# EAGLE board Lab 3 PCB_schematic_redo (EAGLE 9.1.3)
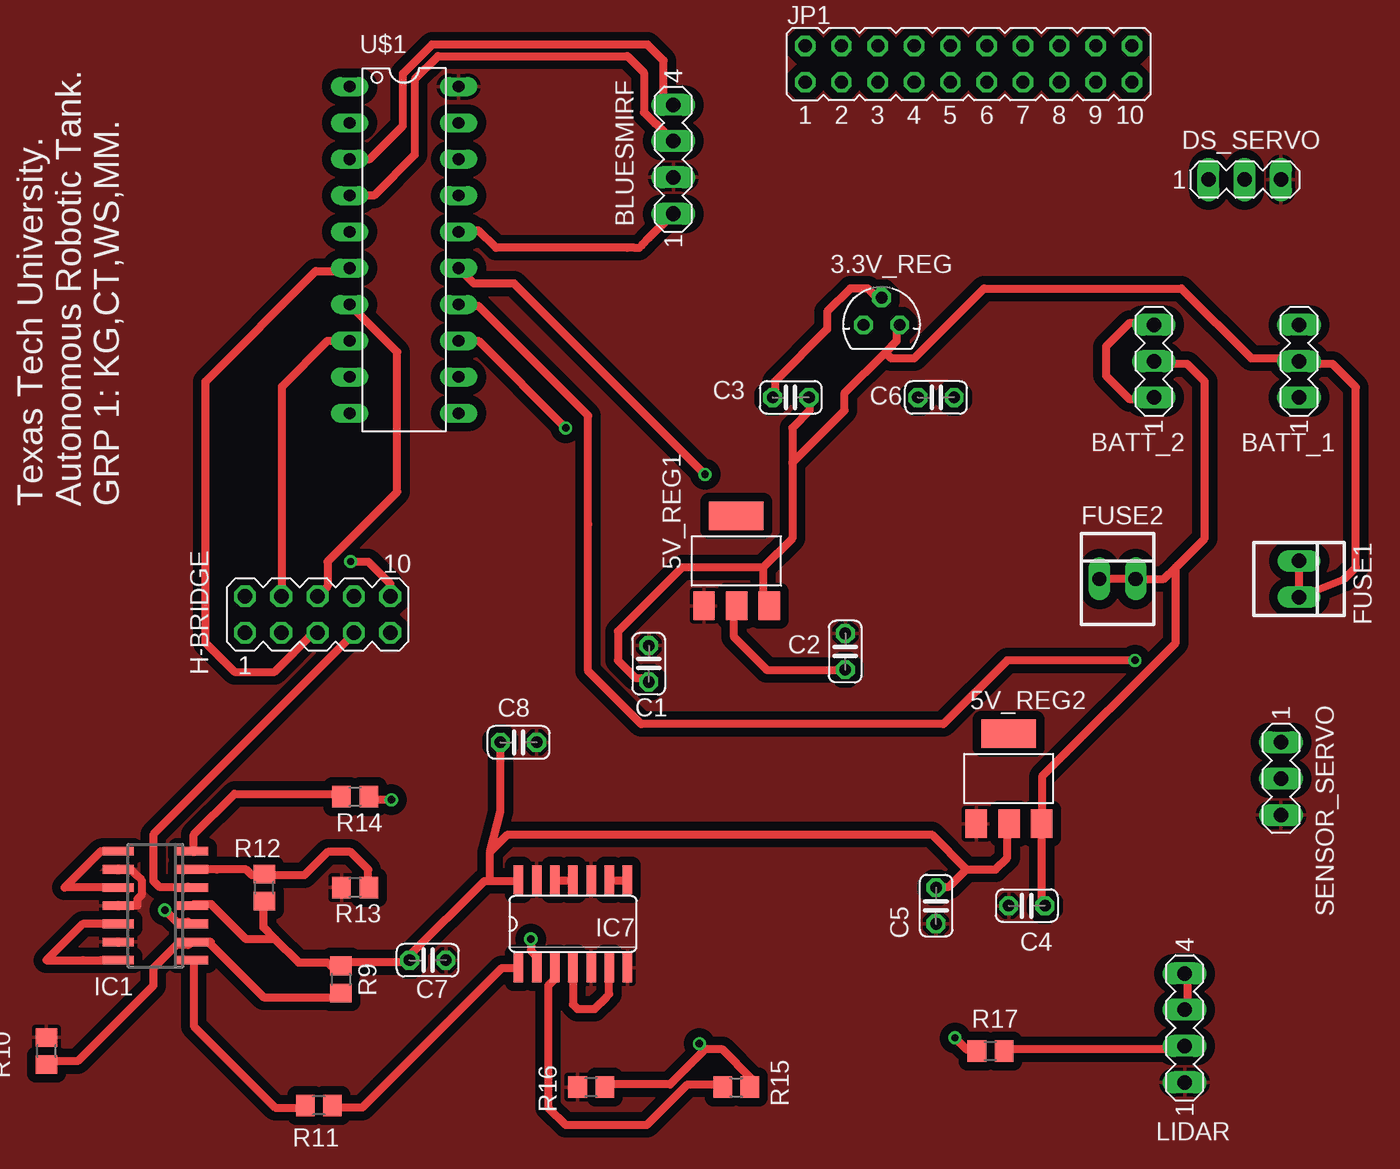
[diagram p0: board, top side]
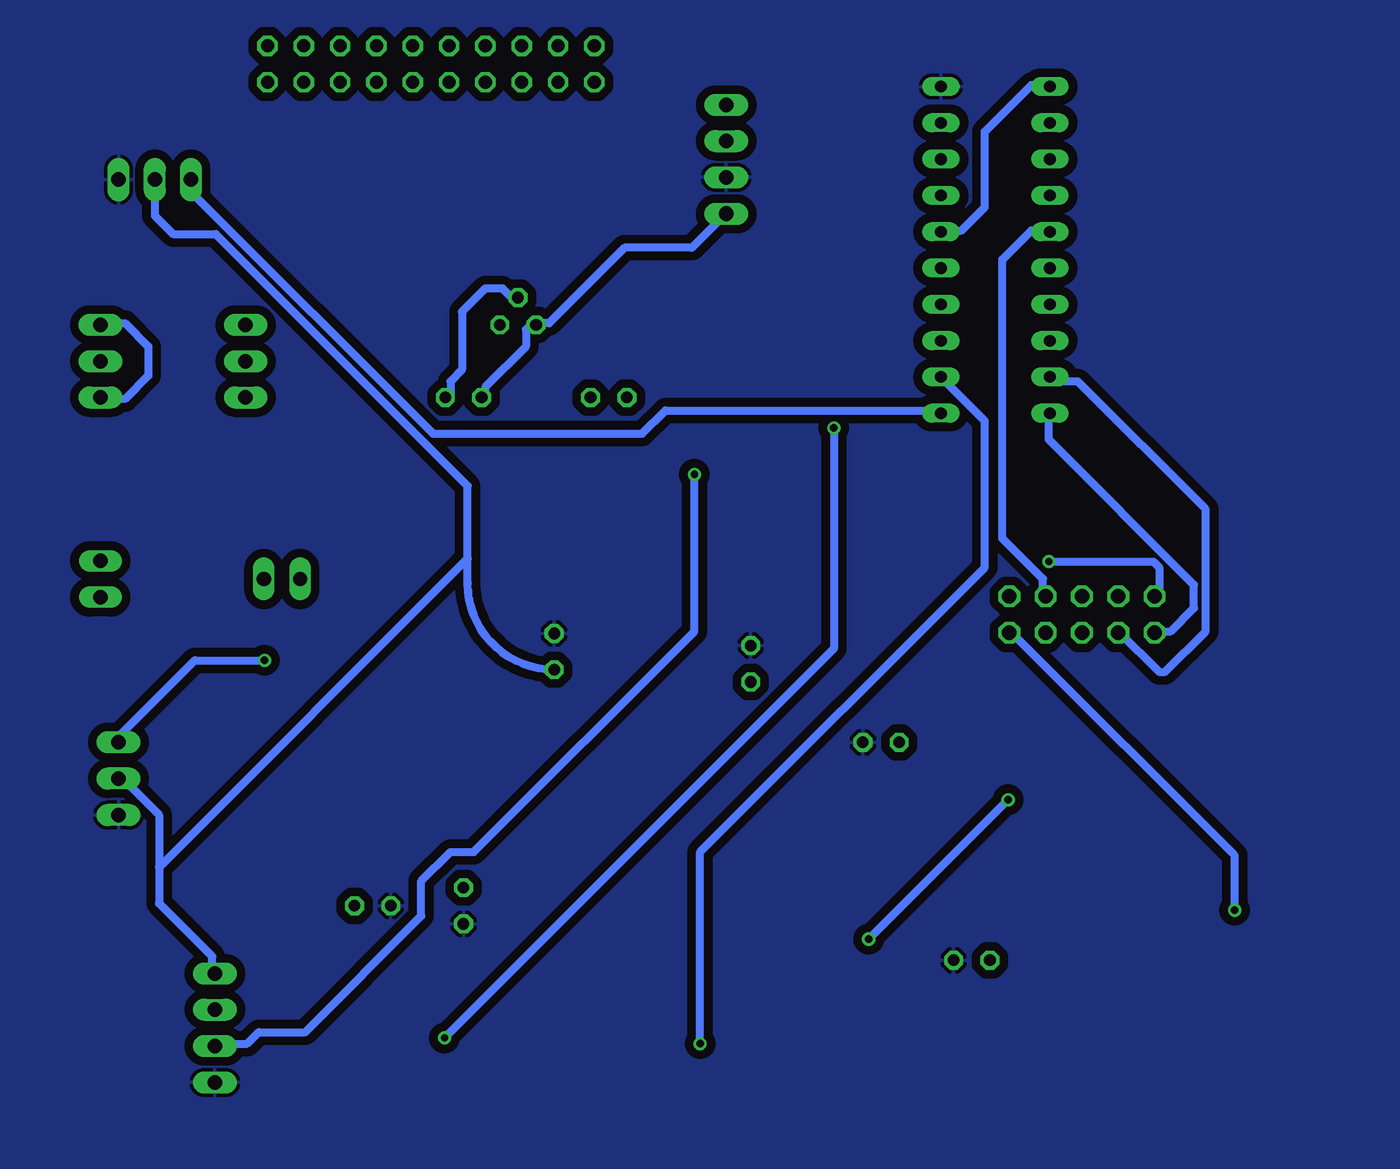
[diagram p1: board, bottom side, seen from below]

No outline drawn. Coordinates in mm, seen from the top.
Copper layers (1*16): Top 0.035mm / dielectric 1.5mm / Bottom 0.035mm
Design rules "default *": minimum track width 20mil, minimum drill 0.35mm, track to track 10mil, track to pad 10mil, pad to pad 10mil, via to via 6mil, smd to smd 6mil, copper to edge 30mil, drill to drill 14mil, minimum pad ring 10mil, minimum via ring 8mil, stop-mask expansion 4mil, vias tented up to drill 0mil, thermal gap 10mil
Net classes: 0 default: width 0.559 mm, drill 0.508 mm, clearance 0.254 mm

## Footprints (pad centres in the part's own frame; a part is rotated, then mirrored left to right if it is on the bottom)
78LXX = drill 0.813 octagon: GND 0,1.905; IN 1.27,0; OUT -1.27,0
SOT223 = smd 1.499 x 2.007: 1 -2.261,-3.15; 2 0.025,-3.15; 3 2.311,-3.15 | smd 3.81 x 2.007: 4 0,3.15
MA03-1 = drill 1.016 long: 1 -2.54,0; 2 0,0; 3 2.54,0
MA04-1 = drill 1.016 long: 1 -3.81,0; 2 -1.27,0; 3 1.27,0; 4 3.81,0
C025-024X044 = drill 0.813 octagon: 1 -1.27,0; 2 1.27,0
22-23-2021 = drill 1 long: 1 -1.27,0; 2 1.27,0
MA05-2 = drill 1.016 octagon: 1 -5.08,-1.27; 2 -5.08,1.27; 3 -2.54,-1.27; 4 -2.54,1.27; 5 0,-1.27; 6 0,1.27; 7 2.54,-1.27; 8 2.54,1.27; 9 5.08,-1.27; 10 5.08,1.27
SO14 = smd 0.6 x 2.2: 1 -3.81,-2.6; 2 -2.54,-2.6; 3 -1.27,-2.6; 4 0,-2.6; 5 1.27,-2.6; 6 2.54,-2.6; 7 3.81,-2.6; 8 3.81,2.6; 9 2.54,2.6; 10 1.27,2.6; 11 0,2.6; 12 -1.27,2.6; 13 -2.54,2.6; 14 -3.81,2.6
SO14' = smd 0.66 x 2.032: 1 -3.81,-3.073; 2 -2.54,-3.073; 3 -1.27,-3.073; 4 0,-3.073; 5 1.27,-3.073; 6 2.54,-3.073; 7 3.81,-3.073; 8 3.81,3.073; 9 2.54,3.073; 10 1.27,3.073; 11 0,3.073; 12 -1.27,3.073; 13 -2.54,3.073; 14 -3.81,3.073
JP10Q = drill 0.914 octagon: 1 -11.43,-1.27; 2 -11.43,1.27; 3 -8.89,-1.27; 4 -8.89,1.27; 5 -6.35,-1.27; 6 -6.35,1.27; 7 -3.81,-1.27; 8 -3.81,1.27; 9 -1.27,-1.27; 10 -1.27,1.27; 11 1.27,-1.27; 12 1.27,1.27; 13 3.81,-1.27; 14 3.81,1.27; 15 6.35,-1.27; 16 6.35,1.27; 17 8.89,-1.27; 18 8.89,1.27; 19 11.43,-1.27; 20 11.43,1.27
R0805 = smd 1.3 x 1.5: 1 -0.95,0; 2 0.95,0
N20 = drill 0.813 long: 1 -11.435,-3.81; 2 -8.895,-3.81; 3 -6.355,-3.81; 4 -3.815,-3.81; 5 -1.275,-3.81; 6 1.265,-3.81; 7 3.805,-3.81; 8 6.345,-3.81; 9 8.885,-3.81; 10 11.425,-3.81; 11 11.425,3.81; 12 8.885,3.81; 13 6.345,3.81; 14 3.805,3.81; 15 1.265,3.81; 16 -1.275,3.81; 17 -3.815,3.81; 18 -6.355,3.81; 19 -8.895,3.81; 20 -11.435,3.81

## Placement (x,y rotation side)
3.3V_REG  3.3V  [78LXX]  64.77,58.42 0 top
5V_REG1  REG1117  [SOT223]  54.61,41.91 0 top
5V_REG2  REG1117  [SOT223]  73.66,26.67 0 top
BATT_1  10V  [MA03-1]  93.98,55.88 90 top
BATT_2  9V  [MA03-1]  83.82,55.88 90 top
BLUESMIRF  3.3V  [MA04-1]  50.2,70.01 90 top
C1  0.33uF  [C025-024X044]  48.49,34.71 90 top
C2  0.1uF  [C025-024X044]  62.23,35.56 90 top
C3  0.33uF  [C025-024X044]  58.42,53.34 180 top
C4  0.33uF  [C025-024X044]  74.93,17.78 180 top
C5  0.1uF  [C025-024X044]  68.58,17.78 270 top
C6  0.1uF  [C025-024X044]  68.58,53.34 0 top
C7  0.1uF  [C025-024X044]  33.02,13.97 0 top
C8  0.1uF  [C025-024X044]  39.37,29.21 0 top
DS_SERVO  5V  [MA03-1]  90.17,68.58 0 top
FUSE1  22-23-2021  [22-23-2021]  93.98,40.64 270 top
FUSE2  22-23-2021  [22-23-2021]  81.28,40.64 0 top
H-BRIDGE  9.6V  [MA05-2]  25.32,38.15 0 top
IC1  LM324D  [SO14]  13.97,17.78 90 top
IC7  74LS32D  [SO14']  43.18,16.51 0 top
JP1  5V  [JP10Q]  70.86,76.66 0 top
LIDAR  5V  [MA04-1]  85.97,9.23 90 top
R9  122k  [R0805]  26.95,12.62 270 top
R10  36k  [R0805]  6.35,7.62 90 top
R11  1.2k  [R0805]  25.4,3.81 180 top
R12  122k  [R0805]  21.59,19.05 90 top
R13  36k  [R0805]  27.94,19.05 180 top
R14  1.2k  [R0805]  27.94,25.4 180 top
R15  10k  [R0805]  54.61,5.08 0 top
R16  15.1k  [R0805]  44.45,5.08 180 top
R17  1k  [R0805]  72.39,7.62 0 top
SENSOR_SERVO  5V  [MA03-1]  92.71,26.67 270 top
U$1  G2XX3---N20  [N20]  31.37,63.65 270 top

## Library data of the parts
3.3V_REG = v-reg; OC_NEWARK: unknown
5V_REG1 5V_REG2 = burr-brown; OC_FARNELL: 1097566; OC_NEWARK: unknown; SPICEPREFIX: J
BATT_1 BATT_2 BLUESMIRF DS_SERVO H-BRIDGE LIDAR SENSOR_SERVO = con-lstb; OC_FARNELL: unknown; OC_NEWARK: unknown
C1-C8 = resistor
FUSE1 FUSE2 = con-molex; MF: MOLEX; MPN: 22-23-2021; OC_FARNELL: 1462926; OC_NEWARK: 25C3832
IC1 = linear; OC_NEWARK: unknown
IC7 = 74xx-us; OC_NEWARK: unknown
JP1 = jumper
R9-R17 = rcl; OC_NEWARK: unknown; SPICEPREFIX: R
U$1 = TI_MSP430_v16; OC_NEWARK: unknown

## Nets
3.3V: 3.3V_REG.OUT BLUESMIRF.1 C6.1 U$1.1 U$1.16
5V: 5V_REG1.2 C2.1 DS_SERVO.2 LIDAR.3 LIDAR.4 SENSOR_SERVO.2
+9V: 5V_REG2.3 BATT_2.2 C4.1 FUSE2.1 FUSE2.2
+10V: 3.3V_REG.IN 5V_REG1.3 BATT_1.2 C1.1 C3.1 FUSE1.1 FUSE1.2
CURRENT_SENS: R15.2 R16.1 U$1.12
DS_SERVO: DS_SERVO.1 U$1.11
EN_A: H-BRIDGE.8 U$1.5
EN_B: H-BRIDGE.5 U$1.6
GND: 5V_REG1.1 5V_REG2.1 BLUESMIRF.2 C1.2 C2.2 C4.2 C5.2 C7.2 C8.2 DS_SERVO.3 IC1.9 IC1.11 IC1.13 IC7.5 IC7.7 IC7.10 IC7.13 LIDAR.1 R10.2 R13.2 R16.2 SENSOR_SERVO.3 U$1.20
IN1: H-BRIDGE.6 U$1.7
IN2: H-BRIDGE.4 U$1.8
IN3: H-BRIDGE.3 U$1.9
IN4: H-BRIDGE.1 U$1.10
MONITOR: LIDAR.2 R17.2 U$1.15
N$1: 3.3V_REG.GND C3.2 C6.2
N$2: IC1.8 IC1.10
N$3: IC7.4 IC7.6
N$4: IC1.12 IC1.14
N$5: IC1.6 R12.2 R13.1
N$6: H-BRIDGE.2 H-BRIDGE.10
N$7: IC1.2 R9.2 R10.1
N$8: BATT_1.1 BATT_1.3
N$9: BATT_2.1 BATT_2.3
N$17: IC7.1 R11.1
N$19: IC1.1 R11.2
N$20: IC1.7 R14.2
N$21: IC7.2 R14.1
N$22: IC7.3 R15.1
N$28: IC7.8 IC7.9
N$29: IC7.11 IC7.12
RX: BLUESMIRF.4 U$1.3
SENS__A: H-BRIDGE.9 IC1.3
SENS__B: H-BRIDGE.7 IC1.5
SENS_SERVO: SENSOR_SERVO.1 U$1.14
TRIGGER: R17.1 U$1.13
TX: BLUESMIRF.3 U$1.4
VCC: 5V_REG2.2 C5.1 C7.1 C8.1 IC1.4 IC7.14 R9.1 R12.1

## Tracks (layer width: path | path; a pad name or v marks a point on that pad's centre or on a via)
3.3V
  Top 0.559: U$1.16 35.36,65.02 36.58,65.02 37.8,63.8 46.99,63.8 47.5,63.8 47.81,63.8 48.04,64.03 48.52,64.51 | 48.52,64.51 BLUESMIRF.1 | 48.52,64.51
  Bottom 0.559: C6.1 67.06,53.65 67.06,54.05 64.21,56.9 64.21,58.12 63.8,58.52 3.3V_REG.OUT 63.4,58.52 62.59,58.52 57.3,63.8 52.59,63.8 BLUESMIRF.1 | U$1.1 27.64,75.18 28.85,75.18 32.11,71.93 32.11,66.65 33.73,65.02 34.95,65.02 U$1.16
5V
  Top 0.559: LIDAR.3 86.16,10.57 86.16,13.01 LIDAR.4 | 5V_REG1.2 54.46,38.61 54.46,36.58 56.69,34.34 56.71,34.29 C2.1
  Bottom 0.559: LIDAR.4 86.16,13.41 86.16,14.22 89.86,17.93 89.86,20.47 | 68.28,42.06 68.28,47.14 85.9,64.77 88.9,64.77 90.17,66.04 DS_SERVO.2 | 68.28,42.06 89.86,20.47 | 89.86,20.47 89.86,24.13 92.41,26.67 SENSOR_SERVO.2 | C2.1 arc90 68.28,40.34 68.28,42.06
+9V
  Top 0.559: C4.1 76,17.88 76,23.16 5V_REG2.3 76,23.57 76,26.82 85.34,36.17 85.34,41.45 | FUSE2.1 FUSE2.2 84.53,40.64 85.34,41.45 | BATT_2.2 84.12,55.68 86.16,55.68 87.38,54.46 87.38,43.48 85.49,41.59 85.34,41.45
+10V
  Top 0.559: FUSE1.1 FUSE1.2 97.13,40.64 97.94,41.45 97.94,54.05 96.32,55.68 94.28,55.68 BATT_1.2 93.88,56.08 90.63,56.08 85.75,60.96 71.93,60.96 67.06,56.08 65.43,56.08 65.02,56.49 | 58.52,48.77 58.52,51.21 59.74,52.43 59.74,53.24 C3.1 | 58.52,48.77 58.52,43.48 56.49,41.45 | C1.1 48.36,33.73 47.55,33.73 46.33,34.95 46.33,36.98 50.8,41.45 56.49,41.45 | 65.02,56.49 62.18,53.65 62.18,52.43 58.52,48.77 | 65.02,56.49 65.84,57.3 65.84,58.12 3.3V_REG.IN | 56.49,41.45 56.49,39.19 5V_REG1.3
CURRENT_SENS  (via drill 0.51)
  Top 0.559: 52.43,7.72 49.99,5.28 45.52,5.28 R16.1 | 52.43,7.72 53.65,7.72 55.68,5.69 55.68,5.28 R15.2 | 52.43,7.72 v52.02,8.13
  Bottom 0.559: v52.02,8.13 52.02,21.54 32.11,41.45 32.11,51.7 U$1.12
DS_SERVO
  Bottom 0.559: U$1.11 35.36,52.43 54.46,52.43 56.08,50.8 70.71,50.8 87.63,67.72 87.63,68.99 87.36,68.72 DS_SERVO.1
EN_A
  Bottom 0.559: U$1.5 27.64,65.02 28.85,65.02 30.89,62.99 30.89,43.48 28.04,40.64 28.04,39.83 H-BRIDGE.8
EN_B
  Top 0.559: U$1.6 27.23,62.18 25.2,62.18 17.48,54.46 17.48,36.17 19.51,34.14 22.3,34.14 25.05,36.88 H-BRIDGE.5
GND
  Top 0.559: IC1.11 12.7,17.78 12.7,18.23 13,18.53 13,19.57 12.69,19.88 12.25,20.32 IC1.9
  pour Top (isolate 0.61): -2.54,86.36 -5.08,86.36 -5.08,-2.54 116.84,-2.54 116.84,86.36
  pour Bottom (isolate 0.61): -2.54,67.31 -2.54,-3.81 110.49,-3.81 110.49,85.09 97.79,85.09 -2.54,85.09
IN1
  Top 0.559: U$1.7 30.89,56.52 30.89,46.74 26.01,41.86 26.01,40.12 H-BRIDGE.6
IN2
  Top 0.559: U$1.8 27.23,57.3 26.01,57.3 22.82,54.12 22.82,39.47 H-BRIDGE.4
IN3
  Bottom 0.559: U$1.9 27.23,54.46 25.6,54.46 16.66,45.52 16.66,36.98 19.51,34.14 19.91,34.14 22.76,36.98 H-BRIDGE.3
IN4
  Bottom 0.559: U$1.10 27.64,52.02 27.64,50.39 17.48,40.23 17.48,38.61 19.1,36.98 19.91,36.98 H-BRIDGE.1
MONITOR  (via drill 0.51)
  Top 0.559: R17.2 73.56,7.72 85.75,7.72 LIDAR.2 | v52.43,47.95 39.06,61.32 36.25,61.32 U$1.15
  Bottom 0.559: v52.43,47.95 52.43,36.98 67.87,21.54 69.49,21.54 71.53,19.51 71.53,17.07 79.65,8.94 82.91,8.94 83.72,8.13 85.75,8.13 LIDAR.2
N$1
  Top 0.559: C3.2 57.3,53.65 57.3,54.46 60.96,58.12 60.96,59.33 62.59,60.96 63.8,60.96 64.62,60.15 3.3V_REG.GND
  Bottom 0.559: C6.2 69.49,53.65 69.49,54.46 68.68,55.27 68.68,59.33 67.06,60.96 65.84,60.96 65.02,60.15 3.3V_REG.GND
N$2
  Top 0.559: IC1.8 10.16,21.59 7.62,19.05 IC1.10
N$3
  Top 0.559: IC7.4 43.18,10.87 43.48,10.57 44.7,10.57 45.52,11.38 45.72,11.58 IC7.6
N$4
  Top 0.559: IC1.12 8.89,16.51 6.35,13.97 8.89,13.97 10.16,13.97 IC1.14
N$5
  Top 0.559: R13.1 28.85,19.1 28.85,20.32 27.64,21.54 26.01,21.54 24.38,19.91 21.95,19.91 R12.2 21.54,19.91 20.73,19.91 20.32,20.32 18.29,20.32 IC1.6
N$6  (via drill 0.51)
  Top 0.559: v27.64,41.86 28.85,41.86 30.4,40.32 H-BRIDGE.10
  Bottom 0.559: v27.64,41.86 20.32,41.86 19.91,41.45 19.91,39.83 H-BRIDGE.2
N$7
  Top 0.559: R10.1 6.5,6.91 8.53,6.91 13.82,12.19 13.82,13.41 15.44,15.04 16.26,15.04 IC1.2 17.84,15.24 17.79,15.13 21.54,11.38 26.82,11.38 R9.2
N$8
  Bottom 0.559: BATT_1.1 93.88,53.24 92.25,53.24 90.63,54.86 90.63,56.9 92.25,58.52 93.88,58.52 BATT_1.3
N$9
  Top 0.559: BATT_2.1 83.72,53.24 82.09,53.24 80.47,54.86 80.47,56.9 82.09,58.52 83.72,58.52 BATT_2.3
N$17
  Top 0.559: R11.1 26.42,3.66 28.45,3.66 38.2,13.41 39.42,13.41 IC7.1
N$19
  Top 0.559: R11.2 24.38,3.66 22.35,3.66 16.66,9.35 16.66,13.82 IC1.1
N$20
  Top 0.559: R14.2 26.82,25.6 19.51,25.6 16.66,22.76 16.66,21.54 IC1.7
N$21  (via drill 0.51)
  Top 0.559: v30.48,25.2 29.26,25.2 R14.1 | v40.23,15.44 40.23,14.63 40.64,14.22 IC7.2
  Bottom 0.559: v40.23,15.44 v30.48,25.2
N$22
  Top 0.559: R15.1 53.65,5.28 51.21,5.28 48.36,2.44 42.67,2.44 41.45,3.66 41.45,12.19 41.86,12.6 41.86,13.41 IC7.3
N$28
  Top 0.559: IC7.9 45.92,19.51 46.74,19.51 IC7.8
N$29
  Top 0.559: IC7.12 41.86,19.51 43.08,19.51 IC7.11
RX
  Top 0.559: BLUESMIRF.4 49.53,74.49 49.53,76.91 48.41,78.03 33.33,78.03 31.29,76 31.29,72.34 28.96,70.01 U$1.3
SENS__A  (via drill 0.51)
  Top 0.559: v14.63,17.48 15.44,16.66 16.26,16.66 IC1.3
  Bottom 0.559: v14.63,17.48 14.63,21.29 29.97,36.63 30.23,36.88 H-BRIDGE.9
SENS__B
  Top 0.559: IC1.5 16.26,19.1 14.22,19.1 13.82,19.51 13.82,20.32 13.82,22.76 27.64,36.58 H-BRIDGE.7
SENS_SERVO  (via drill 0.51)
  Top 0.559: v82.5,34.95 73.56,34.95 69.09,30.48 47.95,30.48 44.25,34.19 44.25,44.45 44.25,52.07 36.58,59.74 35.36,59.74 U$1.14
  Bottom 0.559: v82.5,34.95 87.38,34.95 92.71,29.62 SENSOR_SERVO.1
TRIGGER  (via drill 0.51)
  Top 0.559: v69.9,8.53 70.71,7.72 71.12,7.72 R17.1 | v42.67,51.21 36.58,57.3 35.36,57.3 U$1.13
  Bottom 0.559: v69.9,8.53 42.67,35.76 v42.67,51.21
TX
  Top 0.559: U$1.4 27.64,67.46 29.26,67.46 32.11,70.31 32.11,75.59 33.73,77.22 46.99,77.22 48.15,76.06 48.15,73.28 48.9,72.52 48.96,72.52 BLUESMIRF.3
VCC
  Top 0.559: 70.71,20.32 72.75,20.32 73.56,21.13 73.56,23.16 5V_REG2.2 | 70.71,20.32 69.49,19.1 68.68,19.1 C5.1 | 22.35,15.44 23.98,13.82 26.01,13.82 26.26,13.57 R9.1 27.23,13.82 31.7,13.82 C7.1 31.7,14.22 36.98,19.51 37.39,19.51 | R12.1 21.54,17.88 21.54,16.26 22.35,15.44 | 37.39,19.51 39.42,19.51 IC7.14 | 22.35,15.44 20.32,15.44 17.88,17.88 16.66,17.88 IC1.4 | 37.39,21.54 38.61,22.76 68.28,22.76 70.71,20.32 | 37.39,19.51 37.39,21.54 | 37.39,21.54 38.1,24.38 C8.1

## Text on the board
tPlace: Texas Tech University. / Autonomous Robotic Tank. / GRP 1: KG,CT,WS,MM.